# Altium PCB JD1622(V4).PcbDoc
Units mm, origin at the board's own origin, x right, y up, seen from the top; angles counter-clockwise.
Board outline 230.25 x 115.65 mm, 2 copper layers (Top Layer, Bottom Layer); 113 components, 117 nets, 494 pads, 248 vias.
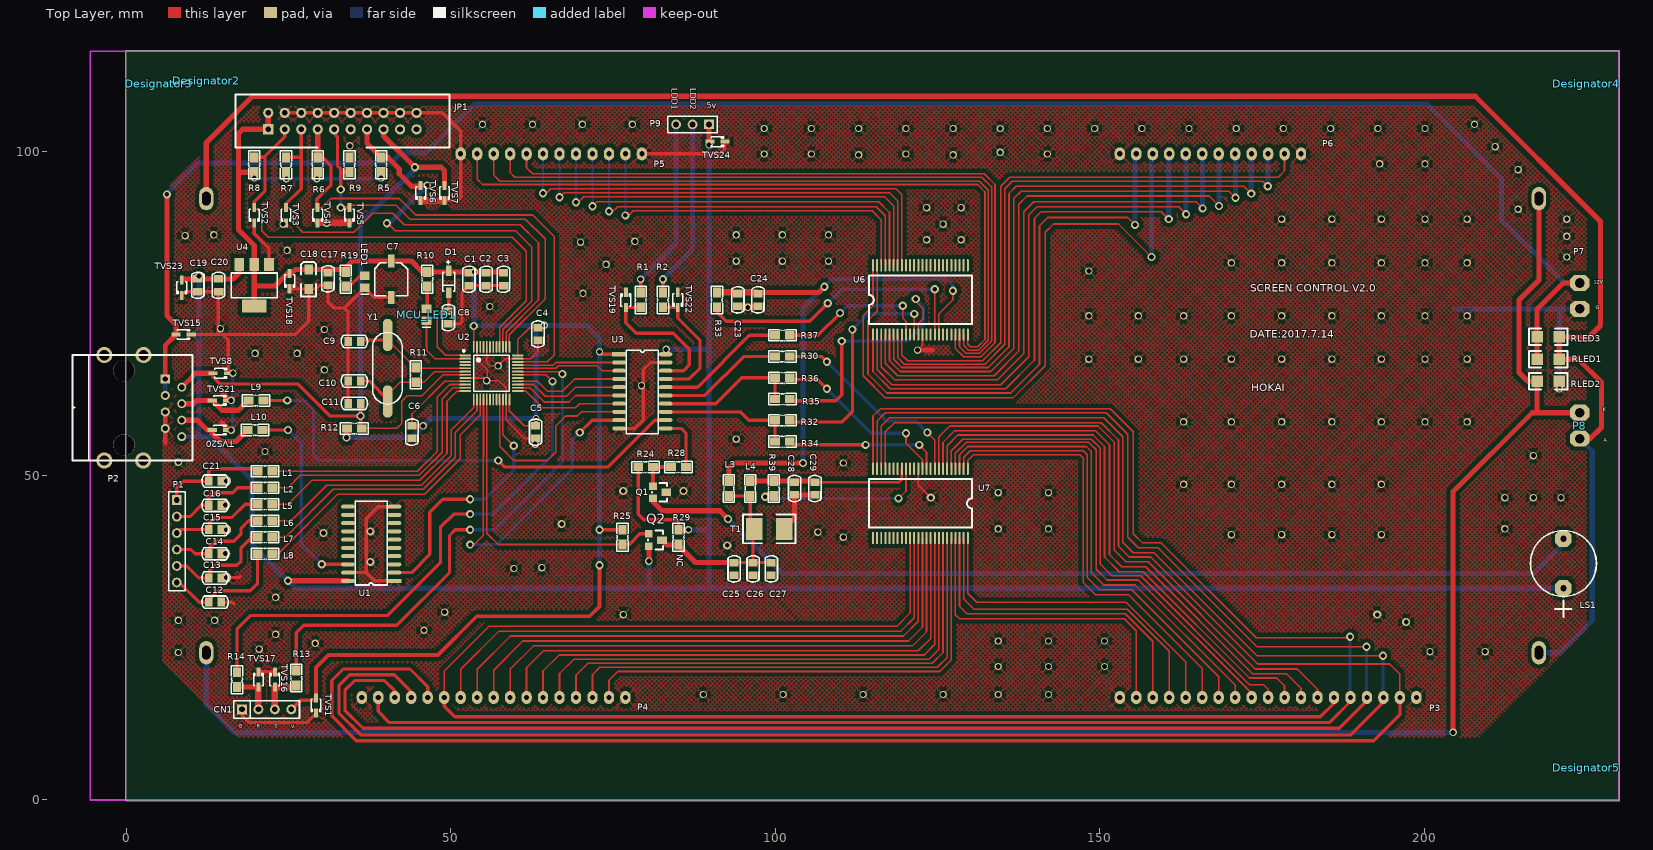
[diagram p0: Top Layer view]
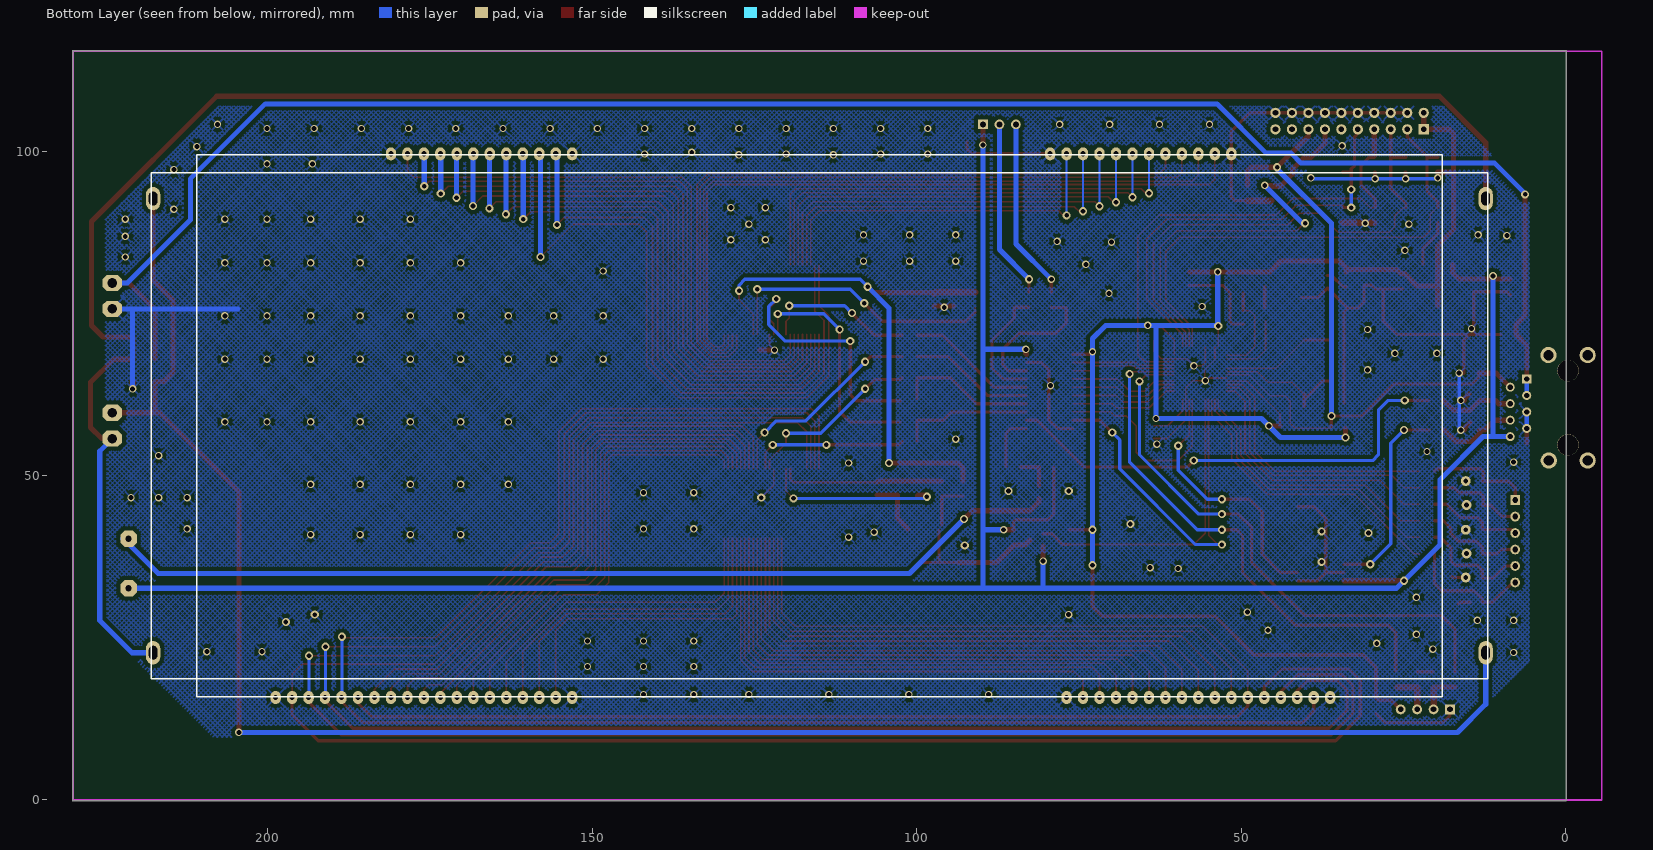
[diagram p1: Bottom Layer view, seen from below]

## Layer stack, top to bottom
Top Layer: signal copper 0.0356
Dielectric: dielectric 0.32, FR-4, Dk 4.8
Bottom Layer: signal copper 0.0356

## Board outline
-0.127,0 -0.127,115.4 cw(c0,115.4) 0,115.527 230,115.527 cw(c230,115.4) 230.127,115.4 230.127,0 cw(c230,0) 230,-0.127 0,-0.127 cw(c0,0)

## Design rules (kind name [scope] priority, off if disabled: settings)
Clearance Clearance_2 [All vs InPolygon] p1: gap=0.6
Clearance Clearance_1 [InNamedPolygon('PET')] p2: gap=3
Clearance [All] p3: gap=0.127
FabricationTestpoint [(IsPad And (OnTopLayer Or OnBottomLayer))] p1: side=3 testpointundercomponent=TRUE minsize=1.016 maxsize=2.54 preferedsize=1.524 minholesize=0 maxholesize=1.016 preferedholesize=0.813 testpointgrid=0.025 allowsidetop=TRUE allowsidebottom=TRUE usegrid=TRUE gridtolerance=0
PolygonConnect [All] p1: connectstyle=Relief reliefconductorwidth=0.3 reliefentries=4 polygonreliefangle="45 Angle"
RoutingVias [All] p1: holewidth=0.711 width=1.27 viastyle="Through Hole" minholewidth=0.711 minwidth=1.27 maxholewidth=0.711 maxwidth=1.27
SilkscreenOverComponentPads [All] p1: minsilkscreentomaskgap=0.254
SolderMaskExpansion [All] p1: expansion=0.102
Width [All] p1: maxlimit=1 minlimit=0.254 preferedwidth=0.5 minimp=50.000000 maximp=50.000000 favimp=50.000000
26 further rules are at their usual default settings.

## Classes and differential pairs
component class M1: C1 C2 C3 C4 C5 C6 C7 C8 C9 C10 C11 C12 C13 C14 C15 C16 C17 C18 C19 C20 C21 CN1 D1 JP1 L1 L2 L5 L6 L7 L8 L9 L10 LED1 LS1 MCU_LED1 P1 P2 P9 Q1 Q2 R1 R2 R5 R6 R7 R8 R9 R10 R11 R12 R13 R14 R19 R24 R25 R28 R29 TVS1 TVS2 TVS3 TVS4 TVS5 TVS6 TVS7 TVS8 TVS15 TVS16 TVS17 TVS18 TVS19 TVS20 TVS21 TVS22 TVS23 TVS24 U1 U2 U3 U4 Y1
component class M2: C23 C24 C25 C26 C27 C28 C29 L3 L4 P3 P4 P5 P6 P7 P8 R30 R32 R33 R34 R35 R36 R37 R39 RLED1 RLED2 RLED3 T1 U6 U7

## Components (designator, comment, footprint, x,y, rotation, side; value= is the part's Value field where it differs from the comment)
C1 "104/0805" C0805 52.705,81.216 r270 top
C2 "104/0805" C0805 55.372,81.216 r270 top
C3 "104/0805" C0805 58.039,81.216 r270 top
C4 "104/0805" C0805 63.373,72.771 r270 top
C5 "104/0805" C0805 62.992,57.658 r270 top
C6 "104/0805" C0805 43.942,57.658 r270 top
C7 "4.7uF/16V" CAP5X5 40.767,80.264 r270 top
C8 "104/0805" C0805 49.53,75.311 r270 top
C9 "22p/0805" C0805 36.068,70.739 r180 top
C10 "22p/0805" C0805 36.068,64.643 r180 top
C11 "105/0805" C0805 34.163,61.087 r0 top
C12 "104/0805" C0805 14.605,30.544 r180 top
C13 "104/0805" C0805 14.605,34.277 r180 top
C14 "104/0805" C0805 14.605,38.011 r180 top
C15 "104/0805" C0805 14.605,41.745 r180 top
C16 "104/0805" C0805 14.605,45.479 r180 top
C17 "104/0805" C0805 30.988,81.28 r270 top
C18 "10UF/16V" C3216 28.067,80.264 r270 top
C19 "104/0805" C0805 10.922,80.282 r270 top
C20 "104/0805" C0805 14.097,80.282 r270 top
C21 "104/0805" C0805 14.605,49.213 r180 top
C23 "104/0805" C0805 94.165,78.042 r270 top
C24 "102/0805" C0805 97.282,78.042 r270 top
C25 "103/0805" C0805 93.599,36.576 r270 top
C26 "105/0805" C0805 96.52,36.576 r270 top
C27 "106/0805" C0805 99.314,36.576 r270 top
C28 "104/0805" C0805 102.928,48.958 r270 top
C29 "102/0805" C0805 106.045,48.958 r270 top
CN1 "SCREEN2" 4Pin-2.54 21.59,13.97 r180 top
D1 "DIODE" SOD123 49.657,81.564 r90 top
Designator2 "Comment" 4.1mm 12.319,110.871 r0 top locked
Designator3 "Comment" 4.1mm 5,110.4 r0 top locked
Designator4 "Comment" 4.1mm 225,110.4 r0 top locked
Designator5 "Comment" 4.1mm 225,5 r0 top locked
JP1 "JTAG" IDC20_A 21.844,103.378 r0 top
L1 "FBMA-11-160808-601T" R0805 20.193,50.673 r0 top
L2 "FBMA-11-160808-601T" R0805 20.193,48.133 r0 top
L3 "10uH/0805" L0805 92.837,46.863 r90 top
L4 "10uH/0805" L0805 96.139,46.863 r90 top
L5 "FBMA-11-160808-601T" R0805 20.193,45.593 r0 top
L6 "FBMA-11-160808-601T" R0805 20.193,43.053 r0 top
L7 "FBMA-11-160808-601T" R0805 20.193,40.513 r0 top
L8 "FBMA-11-160808-601T" R0805 20.193,37.973 r0 top
L9 "FBMA-11-160808-601T" R0805 18.796,61.595 r0 top
L10 "FBMA-11-160808-601T" R0805 18.669,57.023 r0 top
LED1 "LED0805" LED_0805 36.703,79.883 r270 top
LS1 "Speaker" SPK 221.488,32.639 r90 top
MCU_LED1 "LED0805" LED_0805 46.228,74.803 r270 top
P1 "Header 6" HDR1X6 7.747,46.228 r270 top
P2 "Header 4X2" RJ45 5.969,64.897 r90 top locked
P3 "Header 19" H1*19 153.1,15.8 r0 top locked
P4 "Header 17" H1*17 36.26,15.8 r0 top locked
P5 "Header 12" H1*12 51.5,99.6 r0 top
P6 "Header 12" H1*12 153.1,99.6 r0 top
P7 "Header 2" CN2 224,75.7 r0 top locked
P8 "Header 2" CN2 224,55.7 r0 top locked
P9 "Header 3" HDR1X3 89.789,104.14 r180 top
Q1 "C9015/TO-92" SOT-23 81.153,48.387 r270 top
Q2 "C9015/TO-92" "SOT-23 - 9015" 80.518,41.021 r270 top
R1 "1KΩ/0.25W" R0805 79.248,75.946 r90 top
R2 "1KΩ/0.25W" R0805 82.677,75.946 r90 top
R5 "10kΩ/0.25W" R0805 39.243,99.06 r270 top
R6 "10kΩ/0.25W" R0805 29.456,99.06 r270 top
R7 "10kΩ/0.25W" R0805 24.575,99.06 r270 top
R8 "10kΩ/0.25W" R0805 19.685,99.06 r270 top
R9 "10kΩ/0.25W" R0805 34.352,96.775 r90 top
R10 "10kΩ/0.25W" R0805 46.355,81.407 r270 top
R11 "1MΩ/0.25W" R0805 44.577,66.675 r270 top
R12 "10kΩ/0.25W" R0805 36.258,57.277 r180 top
R13 "100Ω/0.25W" R0805 26.162,19.939 r270 top
R14 "100Ω/0.25W" R0805 17.018,19.685 r270 top
R19 "1kΩ/0.25W" R0805 33.782,81.407 r270 top
R24 "10kΩ/0.25W" R0805 81.153,51.308 r180 top
R25 "1kΩ/0.25W" R0805 76.454,39.37 r90 top
R28 "3kΩ/0.25W" R0805 86.233,51.308 r180 top
R29 "NC" R0805 85.09,39.37 r90 top
R30 "1MΩ/0.25W" R0805 99.949,68.351 r0 top
R32 "1MΩ/0.25W" R0805 99.949,58.522 r0 top
R33 "3KΩ/0.25W" R0805 91.001,78.231 r270 top
R34 "1MΩ/0.25W" R0805 99.949,55.245 r0 top
R35 "1MΩ/0.25W" R0805 99.949,61.798 r0 top
R36 "1MΩ/0.25W" R0805 99.949,65.075 r0 top
R37 "1MΩ/0.25W" R0805 99.949,71.628 r0 top
R39 "3KΩ/0.25W" R0805 99.764,49.148 r270 top
RLED1 "100Ω/0.25W" 1206 217.424,67.945 r0 top locked
RLED2 "100Ω/0.25W" 1206 220.853,64.516 r180 top locked
RLED3 "100Ω/0.25W" 1206 217.424,71.374 r0 top locked
T1 "6.0CA" TVS 101.346,41.783 r180 top
TVS1 "ESD05V32D-LC" SOD323 29.21,15.748 r270 top
TVS2 "ESD05V32D-LC" SOD323 19.684,91.313 r270 top
TVS3 "ESD05V32D-LC" SOD323 24.574,91.313 r270 top
TVS4 "ESD05V32D-LC" SOD323 29.456,91.313 r270 top
TVS5 "ESD05V32D-LC" SOD323 34.353,91.313 r270 top
TVS6 "ESD05V32D-LC" SOD323 45.339,94.742 r270 top
TVS7 "ESD05V32D-LC" SOD323 49.022,94.742 r270 top
TVS8 "ESD05V32D-LC" SOD323 13.335,65.786 r0 top
TVS15 "ESD15V32D-LC" SOD323 7.62,71.755 r0 top
TVS16 "ESD05V32D-LC" SOD323 22.86,17.399 r90 top
TVS17 "ESD05V32D-LC" SOD323 20.32,17.399 r90 top
TVS18 "ESD05V32D-LC" SOD323 25.146,81.153 r270 top
TVS19 "ESD08V32D-LC" SOD323 76.962,75.913 r90 top
TVS20 "ESD08V32D-LC" SOD323 13.208,57.023 r0 top
TVS21 "ESD08V32D-LC" SOD323 13.208,61.595 r0 top
TVS22 "ESD15V32D-LC" SOD323 84.963,78.263 r270 top
TVS23 "ESD08V32D-LC" SOD323 8.509,80.137 r270 top
TVS24 "ESD08V32D-LC" SOD323 89.916,101.473 r0 top
U1 "74HC245" SOP-20 41.275,33.782 r180 top
U2 "STM32F103C" LC-LQFP-48_7x7x05P 56.261,65.786 r270 top
U3 "74HC245" SOP-20 75.946,68.707 r0 top
U4 "AS1117M3-33/SOT-223" SOT-223-3L(M3) 21.971,82.55 r180 top
U6 "HT1621" HT1621B(SSOP) 115.062,71.755 r90 top
U7 "HT1621" HT1621B(SSOP) 129.667,51.054 r270 top
Y1 "XTAL" XTAL2 40.259,66.548 r90 top

## Footprints (in the part's own frame and the unit in brackets; to place one, negate y for a bottom-side part, rotate by r counter-clockwise, add the part's x,y. Pads: shape width x height; smd on the part's side, far side on the other; paste and mask are expansions set on the pad)
4.1mm [mm]
4Pin-2.54 [mil]
  rect 60x60 hole 35: 1(150,0)
  round 60 hole 35: 2(50,0) 3(-50,0) 4(-150,0)
  silkscreen extent -200,-52 200,53, body extent -200,-50 200,50, height 336
1206 [mil]
  rect 70x70 smd: 1(0,0) 2(135,0)
  silkscreen extent -50,-50 185,50
C0805 [mil]
  rect 45.37x55.12 smd: 1(-1,2) 2(76,2)
  silkscreen extent -42,-35 117,40
C3216 [mil] "A型/1206"
  rect 60x51.18 smd: 1(-59,0) 2(59,0)
  silkscreen extent -105,-45 105,45, body extent -63,-31 63,32, height 63
CAP5X5 [mm]
  rect 2x1 smd: 1(-2.794,0) 2(2.794,0)
  silkscreen extent -2.54,-2.54 2.54,2.54, body extent -2.27,-2.15 2.33,2.15, height 5.2
CN2 [mm]
  oct 3x2.5 hole 1.5: 1(0,0) 2(0,4)
H1*12 [mm]
  oval 1.6x2 hole 0.8: 1(0,0) 2(2.54,0) 3(5.08,0) 4(7.62,0) 5(10.16,0) 6(12.7,0) 7(15.24,0) 8(17.78,0) 9(20.32,0) 10(22.86,0) 11(25.4,0) 12(27.94,0)
H1*17 [mm]
  oval 1.6x2 hole 0.8: 1(0,0) 2(2.54,0) 3(5.08,0) 4(7.62,0) 5(10.16,0) 6(12.7,0) 7(15.24,0) 8(17.78,0) 9(20.32,0) 10(22.86,0) 11(25.4,0) 12(27.94,0) 13(30.48,0) 14(33.02,0) 15(35.56,0) 16(38.1,0) 17(40.64,0)
H1*19 [mm]
  oval 1.6x2 hole 0.8: 1(0,0) 2(2.54,0) 3(5.08,0) 4(7.62,0) 5(10.16,0) 6(12.7,0) 7(15.24,0) 8(17.78,0) 9(20.32,0) 10(22.86,0) 11(25.4,0) 12(27.94,0) 13(30.48,0) 14(33.02,0) 15(35.56,0) 16(38.1,0) 17(40.64,0) 18(43.18,0) 19(45.72,0)
HDR1X3 [mm] "Connector; Header; 3 Position"
  rect 1.5x1.5 hole 0.9: 1(0,0)
  round 1.5 hole 0.9: 2(2.54,0) 3(5.08,0)
  silkscreen extent -1.27,-1.27 6.35,1.27
HDR1X6 [mm] "Connector; Header; 6 Position"
  rect 1.5x1.5 hole 0.9: 1(0,0)
  round 1.5 hole 0.9: 2(2.54,0) 3(5.08,0) 4(7.62,0) 5(10.16,0) 6(12.7,0)
  silkscreen extent -1.27,-1.27 13.97,1.27
HT1621B(SSOP) [mil]
  oval 75x12 smd: 1(0,0) 2(0,-25) 3(0,-50) 4(0,-75) 5(0,-100) 6(0,-125) 7(0,-150) 8(0,-175) 9(0,-200) 10(0,-225) 11(0,-250) 12(0,-275) 13(0,-300) 14(0,-325) 15(0,-350) 16(0,-375) 17(0,-400) 18(0,-425) 19(0,-450) 20(0,-475) 21(0,-500) 22(0,-525) 23(0,-550) 24(0,-575) 25(420,-575) 26(420,-550) 27(420,-525) 28(420,-500) 29(420,-475) 30(420,-450) 31(420,-425) 32(420,-400) 33(420,-375) 34(420,-350) 35(420,-325) 36(420,-300) 37(420,-275) 38(420,-250) 39(420,-225) 40(420,-200) 41(420,-175) 42(420,-150) 43(420,-125) 44(420,-100) 45(420,-75) 46(420,-50) 47(420,-25) 48(420,0)
  silkscreen extent 63,-600 358,25
IDC20_A [mil]
  rect 62x62 hole 35: 1(0,0)
  round 62 hole 35: 2(0,100) 3(100,0) 4(100,100) 5(200,0) 6(200,100) 7(300,0) 8(300,100) 9(400,0) 10(400,100) 11(500,0) 12(500,100) 13(600,0) 14(600,100) 15(700,0) 16(700,100) 17(800,0) 18(800,100) 19(900,0) 20(900,100)
  silkscreen extent -200,-110 1100,210
L0805 [mil]
  rect 60x50 smd: 1(0,0) 2(90,0)
  silkscreen extent -39,-34 129,34
LC-LQFP-48_7x7x05P [mm]
  oval 0.28x1.8 smd mask+0.051: 1(-2.75,-4.05) 2(-2.25,-4.05) 3(-1.75,-4.05) 4(-1.25,-4.05) 5(-0.75,-4.05) 6(-0.25,-4.05) 7(0.25,-4.05) 8(0.75,-4.05) 9(1.25,-4.05) 10(1.75,-4.05) 11(2.25,-4.05) 12(2.75,-4.05) 25(2.75,4.05) 26(2.25,4.05) 27(1.75,4.05) 28(1.25,4.05) 29(0.75,4.05) 30(0.25,4.05) 31(-0.25,4.05) 32(-0.75,4.05) 33(-1.25,4.05) 34(-1.75,4.05) 35(-2.25,4.05) 36(-2.75,4.05)
  oval 1.8x0.28 smd mask+0.051: 13(4.05,-2.75) 14(4.05,-2.25) 15(4.05,-1.75) 16(4.05,-1.25) 17(4.05,-0.75) 18(4.05,-0.25) 19(4.05,0.25) 20(4.05,0.75) 21(4.05,1.25) 22(4.05,1.75) 23(4.05,2.25) 24(4.05,2.75) 37(-4.05,2.75) 38(-4.05,2.25) 39(-4.05,1.75) 40(-4.05,1.25) 41(-4.05,0.75) 42(-4.05,0.25) 43(-4.05,-0.25) 44(-4.05,-0.75) 45(-4.05,-1.25) 46(-4.05,-1.75) 47(-4.05,-2.25) 48(-4.05,-2.75)
  silkscreen extent -3.6,-4.42 2.75,2.75
LED_0805 [mm]
  rect 1.3x1.5 smd: 1(-0.95,0) 2(0.95,0)
  silkscreen extent 1.91,-0.63 1.91,0.64
R0805 [mil]
  rect 60x50 smd: 1(0,0) 2(90,0)
  silkscreen extent -39,-35 129,35
RJ45 [mil]
  rect 55x55 hole 31.5: 1(0,0)
  round 55 hole 31.5: 2(-50,-100) 3(-100,0) 4(-150,-100) 5(-200,0) 6(-250,-100) 7(-300,0) 8(-350,-100)
  round 130 hole 127.95 unplated: 9(50,250) 10(-400,250)
  round 98.42 hole 62.99: 11(145,370) 12(-495,370) ""(-495,133.78) ""(145,131.89)
  silkscreen extent -495,-165 145,563, body extent -490,-172 140,556, height 128
SOD123 [mm] "1206"
  rect 1.6x0.85 smd: A(0,0) K(-3.4,0)
  silkscreen extent -3.15,-0.9 1.6,0.9, body extent -3.6,-0.85 0.25,0.85, height 1.42
SOD323 [mm] "0805"
  rect 1.4x0.6 smd: 1(0,0) 2(2.35,0)
  silkscreen extent 0.22,-0.75 2.12,0.75, body extent -0.17,-0.67 2.43,0.63, height 1
SOP-20 [mm]
  rect 2.2x0.62 smd: 1(-0.025,0)
  oval 2.1x0.62 smd: 2(-0.025,-1.27) 3(-0.025,-2.54) 4(-0.025,-3.81) 5(-0.025,-5.08) 6(-0.025,-6.35) 7(-0.025,-7.62) 8(-0.025,-8.89) 9(-0.025,-10.16) 10(-0.025,-11.43) 11(7.143,-11.43) 12(7.143,-10.16) 13(7.143,-8.89) 14(7.143,-7.62) 15(7.143,-6.35) 16(7.143,-5.08) 17(7.143,-3.81) 18(7.143,-2.54) 19(7.143,-1.27) 20(7.143,0)
  silkscreen extent 1.07,-12.24 6.02,0.64
SOT-23 [mil]
  rect 46x46 smd: 1(0,0) 2(75,0)
  rect 46x60 smd: 3(38,80)
  silkscreen extent -20,-5 95,85
"SOT-23 - 9015" [mil]
  rect 46x46 smd: 1(0,0) 2(75,0)
  rect 46x60 smd: 3(38,80)
  silkscreen extent -20,-5 95,85
SOT-223-3L(M3) [mil]
  rect 59x79 smd: 1(0,0) 2(90.55,0) 3(181.1,0)
  rect 150x79 smd: 4(89.88,253.54)
  silkscreen extent -49,52 231,202
SPK [mil]
  oct 100x100 hole 39: 1(0,-0.13) 2(300,-0.13)
  silkscreen extent -175,-200 350,200
TVS [mil]
  rect 100x135 smd: 1(0,0) 2(180,0)
  silkscreen extent -70,-87 250,87
XTAL2 [mm]
  oval 5x1.5 smd: 1(-5.12,0) 2(5.13,0)
  silkscreen extent -5.54,-2.24 5.52,2.34

## Part data
C1 C2 C3 C4 C5 C6 C8 C11 C12 C13 C14 C15 C16 C17 C19 C20 C21 C23 C24 C25 C26 C27 C28 C29: library part CAP, "Capacitor"
C7 C18: library part ELECTRO1, "Electrolytic Capacitor"
C9 C10: library part CAP
CN1: library part CON4, "Connector"
JP1: library part JTAG20
L1 L2 L5 L6 L7 L8 L9 L10 R1 R2 R5 R6 R7 R8 R9 R10 R11 R12 R13 R14 R19 R24 R25 R28 R29 R30 R32 R33 R34 R35 R36 R37 R39 RLED1 RLED2 RLED3: library part RES2
L3 L4: library part INDUCTOR1
LS1: "Loudspeaker"
P1: "Header, 6-Pin"
P2: "Header, 4-Pin, Dual row"
P3: "Header, 19-Pin"
P4: "Header, 17-Pin"
P5 P6: "Header, 12-Pin"
P7 P8: "Header, 2-Pin"
P9: "Header, 3-Pin"
Q1 Q2: library part PNP
T1: library part "Diode 11DQ03", "Schottky Rectifier"
TVS1 TVS2 TVS3 TVS4 TVS5 TVS6 TVS7 TVS8 TVS15 TVS16 TVS17 TVS18 TVS19 TVS20 TVS21 TVS22 TVS23 TVS24: library part TVS
U2: "STM32单片机"
U4: library part AS1117M3-33
Y1: "Crystal Oscill"

## Free pads (board coordinates)
  round 1.524 hole 0.762: 0(15.367,49.149) 1(15.24,45.466) 2(15.367,41.656) 3(15.24,37.973) 4(15.367,34.29)
  oval 2.2x3.6 hole 1.3 slot 2.1 at 90 deg: A(12.3,92.7) A(217.7,22.7) K(12.3,22.7) K(217.7,92.7)

## Via types
v1: diameter 1.143, hole 0.762, Top Layer to Bottom Layer, 175 vias
v2: diameter 1.27, hole 0.711, Top Layer to Bottom Layer, 73 vias

## Nets (pads, with @x,y where several pads share a name; then routed paths per layer and width w, separated by ;. In a path a pad name is that pad's centre, name@x,y a point inside that pad or via, vN(x,y) a via of type N, cw(c..) or ccw(c..) an arc to the next point about the centre after c; other vN are vias at no path point)
1C0: P5.5 U6.21 | length 109.5
  Top Layer w0.254: P5.5 61.66,97.471 62.611,96.52 132.207,96.52 133.858,94.869 133.858,70.485 131.699,68.326 129.032,68.326 127.762,69.596 U6.21
1C1: P5.4 U6.22 | length 109.9
  Top Layer w0.254: P5.4 59.12,96.709 59.817,96.012 131.826,96.012 133.35,94.488 133.35,70.739 131.445,68.834 129.413,68.834 128.397,69.85 U6.22
1C2: P5.3 U6.23 | length 110
  Top Layer w0.254: P5.3 56.58,96.328 57.531,95.377 131.445,95.377 132.842,93.98 132.842,70.866 131.318,69.342 129.794,69.342 129.032,70.104 U6.23
1C3: P5.2 U6.24 | length 110.6
  Top Layer w0.254: P5.2 54.04,95.693 54.864,94.869 131.191,94.869 132.334,93.726 132.334,70.993 131.191,69.85 130.048,69.85 129.667,70.231 U6.24
1S0: P6.11 U6.8 | length 91.4
  Top Layer w0.254: U6.8 119.507,68.58 120.396,67.691 131.953,67.691 134.747,70.485 134.747,94.615 136.144,96.012 177.546,96.012 178.5,96.966 P6.11
1S1: P6.10 U6.7 | length 92.1
  Top Layer w0.254: U6.7 118.872,68.199 119.888,67.183 132.334,67.183 135.382,70.231 135.382,94.234 136.525,95.377 175.133,95.377 v2(175.895,94.615)
  Bottom Layer w0.8: v2(175.895,94.615) 175.895,99.535 P6.10
1S2: P6.9 U6.6 | length 91.5
  Top Layer w0.254: U6.6 118.237,67.945 119.507,66.675 132.842,66.675 136.017,69.85 136.017,93.472 137.16,94.615 172.212,94.615 v2(173.355,93.472)
  Bottom Layer w0.8: v2(173.355,93.472) 173.355,99.535 P6.9
1S3: P6.8 U6.5 | length 90.4
  Top Layer w0.254: U6.5 117.602,67.691 119.253,66.04 133.223,66.04 136.779,69.596 136.779,92.71 137.922,93.853 169.926,93.853 v2(170.942,92.837)
  Bottom Layer w0.8: P6.8 170.942,99.538 v2(170.942,92.837)
1S4: P6.7 U6.4 | length 90
  Top Layer w0.254: U6.4 116.967,67.31 118.872,65.405 133.731,65.405 137.541,69.215 137.541,91.821 138.811,93.091 166.878,93.091 v2(168.402,91.567)
  Bottom Layer w0.8: v2(168.402,91.567) P6.7@168.402,99.538
1S5: P6.6 U6.3 | length 88.3
  Top Layer w0.254: U6.3 116.332,66.802 118.364,64.77 134.239,64.77 138.303,68.834 138.303,90.678 139.827,92.202 164.846,92.202 v2(165.862,91.186)
  Bottom Layer w0.8: v2(165.862,91.186) P6.6@165.862,99.538
1S6: P6.5 U6.2 | length 88
  Top Layer w0.254: U6.2 115.697,66.294 117.983,64.008 134.747,64.008 139.065,68.326 139.065,90.17 140.335,91.44 162.179,91.44 v2(163.322,90.297)
  Bottom Layer w0.8: P6.5 163.322,99.538 v2(163.322,90.297)
1S7: P6.4 U6.1 | length 87.1
  Top Layer w0.254: U6.1 115.062,66.04 117.729,63.373 135.509,63.373 139.954,67.818 139.954,89.662 140.97,90.678 159.512,90.678 v2(160.655,89.535)
  Bottom Layer w0.8: v2(160.655,89.535) 160.655,99.535 P6.4
1S8: P6.3 U6.48 | length 104.8
  Top Layer w0.254: U6.48 115.062,76.2 113.538,74.676 113.538,65.405 116.967,61.976 136.652,61.976 141.605,66.929 141.605,87.503 142.875,88.773 152.908,88.773 v2(157.988,83.693)
  Bottom Layer w0.8: v2(157.988,83.693) 157.988,99.408 P6.3
1S9: P6.2 U6.47 | length 94.6
  Top Layer w0.254: U6.47 115.697,75.311 114.3,73.914 114.3,65.659 117.221,62.738 136.271,62.738 140.716,67.183 140.716,88.519 141.986,89.789 154.305,89.789 v2(155.448,88.646)
  Bottom Layer w0.8: v2(155.448,88.646) P6.2@155.448,99.408
1S10: P5.11 U6.46 | length 56.8
  Top Layer w0.254: v2(76.9,90.105) 77.405,90.105 78.105,90.805 114.935,90.805 116.332,89.408 U6.46
  Bottom Layer w0.254: v2(76.9,90.105) P5.11
1S11: P5.10 U6.45 | length 60
  Top Layer w0.254: v2(74.36,90.743) 74.995,90.743 75.692,91.44 115.57,91.44 116.967,90.043 U6.45
  Bottom Layer w0.254: v2(74.36,90.743) P5.10
1S12: P5.9 U6.44 | length 63
  Top Layer w0.254: v2(71.82,91.502) 72.52,92.202 115.951,92.202 117.602,90.551 U6.44
  Bottom Layer w0.254: v2(71.82,91.502) P5.9
1S13: P5.8 U6.43 | length 66.5
  Top Layer w0.254: v2(69.28,92.137) 69.658,92.137 70.485,92.964 116.84,92.964 118.237,91.567 U6.43
  Bottom Layer w0.254: v2(69.28,92.137) P5.8
1S14: P5.7 U6.42 | length 69.6
  Top Layer w0.254: v2(66.74,92.899) 67.44,93.599 117.602,93.599 118.872,92.329 U6.42
  Bottom Layer w0.254: v2(66.74,92.899) P5.7
1S15: P5.6 U6.41 | length 73
  Top Layer w0.254: v2(64.2,93.534) 64.705,93.534 65.405,94.234 118.618,94.234 119.507,93.345 U6.41
  Bottom Layer w0.254: v2(64.2,93.534) P5.6
2C0: P3.18 P4.5 U7.21 | length 309.2
  Top Layer w0.254: U7.21 116.967,56.769 118.364,58.166 150.241,58.166 152.908,55.499 152.908,39.116 154.559,37.465 157.861,37.465 174.371,20.955 194.691,20.955 196.28,19.366 P3.18
  Top Layer w0.5: P4.5 46.42,17.461 43.688,20.193 33.401,20.193 31.623,18.415 31.623,12.954 35.433,9.144 192.278,9.144 196.28,13.146 P3.18
2C1: P3.17 P4.4 U7.22 | length 298.8
  Top Layer w0.254: U7.22 116.332,57.658 117.602,58.928 150.622,58.928 153.543,56.007 153.543,39.751 155.194,38.1 158.369,38.1 174.244,22.225 v2(193.675,22.225)
  Top Layer w0.5: P4.4 43.88,16.699 41.275,19.304 34.417,19.304 32.766,17.653 32.766,13.335 36.068,10.033 188.722,10.033 193.74,15.051 P3.17
  Bottom Layer w0.508: P3.17@193.675,15.865 v2(193.675,22.225)
2C2: P3.16 P4.3 U7.23 | length 289.4
  Top Layer w0.254: U7.23 115.697,58.42 116.967,59.69 151.003,59.69 154.305,56.388 154.305,40.513 155.956,38.862 159.004,38.862 174.244,23.622 v2(191.135,23.622)
  Top Layer w0.5: P4.3 41.34,16.826 39.751,18.415 35.179,18.415 33.655,16.891 33.655,13.841 36.447,11.049 186.944,11.049 191.2,15.305 P3.16
  Bottom Layer w0.508: v2(191.135,23.622) 191.135,15.865 P3.16
2C3: P3.15 P4.2 U7.24 | length 270.3
  Top Layer w0.254: U7.24 115.062,59.182 116.205,60.325 151.638,60.325 155.194,56.769 155.194,41.021 156.591,39.624 159.512,39.624 174.117,25.019 188.468,25.019 v2(188.595,25.146)
  Top Layer w0.5: P4.2 38.8,13.651 40.513,11.938 185.42,11.938 188.66,15.178 P3.15
  Bottom Layer w0.254: P3.15@188.468,15.992 188.595,15.865 P3.15
  Bottom Layer w0.508: P3.15@188.595,15.865 v2(188.595,25.146)
2S0: P3.13 U7.8 | length 91.8
  Top Layer w0.254: U7.8 125.222,56.007 126.873,57.658 149.733,57.658 152.273,55.118 152.273,38.481 154.051,36.703 157.48,36.703 173.99,20.193 180.467,20.193 183.58,17.08 P3.13
2S1: P3.12 U7.7 | length 87.7
  Top Layer w0.254: U7.7 125.857,55.118 127.635,56.896 149.352,56.896 151.511,54.737 151.511,37.846 153.416,35.941 157.099,35.941 173.609,19.431 178.816,19.431 181.04,17.207 P3.12
2S2: P3.11 U7.6 | length 84
  Top Layer w0.254: U7.6 126.492,54.61 128.143,56.261 148.971,56.261 150.749,54.483 150.749,37.465 153.035,35.179 156.718,35.179 173.101,18.796 177.292,18.796 178.5,17.588 P3.11
2S3: P3.10 U7.5 | length 80.2
  Top Layer w0.254: U7.5 127.127,53.848 128.905,55.626 148.717,55.626 150.114,54.229 150.114,36.322 151.892,34.544 156.337,34.544 173.101,17.78 175.26,17.78 175.96,17.08 P3.10 P3.10@176.022,15.862
2S4: P3.9 U7.4 | length 76.2
  Top Layer w0.254: U7.4 127.762,53.467 129.413,55.118 148.336,55.118 149.479,53.975 149.479,35.56 151.13,33.909 155.956,33.909 173.42,16.445 P3.9
2S5: P3.8 U7.3 | length 73.2
  Top Layer w0.254: U7.3 128.397,53.213 129.667,54.483 147.955,54.483 148.717,53.721 148.717,35.052 150.622,33.147 155.448,33.147 170.88,17.715 P3.8
2S6: P3.7 U7.2 | length 70.2
  Top Layer w0.254: U7.2 129.032,52.832 130.048,53.848 147.447,53.848 148.082,53.213 148.082,34.29 149.987,32.385 154.94,32.385 168.34,18.985 P3.7
2S7: P3.6 U7.1 | length 67.1
  Top Layer w0.254: U7.1 129.667,52.324 130.556,53.213 146.939,53.213 147.447,52.705 147.447,33.528 149.352,31.623 154.432,31.623 165.8,20.255 P3.6
2S8: P3.5 U7.48 | length 52
  Top Layer w0.254: U7.48 129.667,31.877 131.064,30.48 154.051,30.48 163.26,21.271 P3.5
2S9: P3.4 U7.47 | length 51.5
  Top Layer w0.254: U7.47 129.032,30.988 130.619,29.401 154.242,29.401 160.72,22.922 P3.4
2S10: P3.3 U7.46 | length 51.2
  Top Layer w0.254: U7.46 128.397,29.845 129.54,28.702 153.924,28.702 158.18,24.446 P3.3
2S11: P3.2 U7.45 | length 51
  Top Layer w0.254: U7.45 127.762,28.575 128.397,27.94 153.797,27.94 155.64,26.097 P3.2
2S12: P4.16 U7.44 | length 75.5
  Top Layer w0.254: P4.16 74.36,16.51 74.36,18.48 75.692,19.812 125.349,19.812 127.127,21.59 127.127,26.797 127.127,28.067 U7.44
2S13: P4.15 U7.43 | length 77.7
  Top Layer w0.254: P4.15 71.82,19.304 72.963,20.447 124.968,20.447 126.492,21.971 U7.43
2S14: P4.14 U7.42 | length 79.1
  Top Layer w0.254: P4.14 69.28,19.242 71.12,21.082 124.206,21.082 125.857,22.733 U7.42
2S15: P4.13 U7.41 | length 80.9
  Top Layer w0.254: P4.13 66.74,19.496 68.961,21.717 123.698,21.717 125.222,23.241 U7.41
2S16: P4.12 U7.40 | length 82.6
  Top Layer w0.254: P4.12 64.2,19.877 66.675,22.352 122.936,22.352 124.587,24.003 U7.40
2S17: P4.11 U7.39 | length 84.2
  Top Layer w0.254: P4.11 61.66,20.385 64.262,22.987 122.047,22.987 123.952,24.892 U7.39
2S18: P4.10 U7.38 | length 85.4
  Top Layer w0.254: P4.10 59.12,20.131 62.738,23.749 121.158,23.749 123.317,25.908 U7.38
2S19: P4.9 U7.37 | length 86.8
  Top Layer w0.254: P4.9 56.58,20.004 61.087,24.511 120.523,24.511 122.682,26.67 U7.37
2S20: P4.8 U7.36 | length 88.3
  Top Layer w0.254: P4.8@53.975,15.865 P4.8 54.04,20.131 59.182,25.273 119.761,25.273 122.047,27.559 U7.36
2S21: P4.7 U7.35 | length 89.8
  Top Layer w0.254: P4.7 51.5,20.131 57.404,26.035 119.38,26.035 121.412,28.067 U7.35
2S22: P3.14 P4.6 U7.34 | length 232.1
  Top Layer w0.254: P4.6 48.96,19.877 55.88,26.797 118.745,26.797 120.777,28.829 U7.34
  Top Layer w0.5: P4.6 48.96,14.478 50.611,12.827 184.023,12.827 186.12,14.924 P3.14
3.3V: C1.1 C2.1 C3.1 C4.1 C5.1 C6.1 C7.1 C17.1 C18.1 CN1.4 D1.A JP1.1 JP1.2 R5.2 R6.2 R7.2 R8.2 R10.1 R12.2 R19.1 R25.2 TVS1.1 TVS18.1 U2.9 U2.24 U2.36 U2.48 U3.1 U4.2 U4.4 | length 309.6
  Top Layer w0.254: C6.1 43.993,59.487 49.042,64.536 U2.9 ; U2.48 v2(53.511,73.069) ; U2.24 59.011,59.988 61.316,57.683 C5.1 C5.1@63.424,57.683 ; U2.36 60.311,70.979 62.128,72.796 C4.1
  Top Layer w0.6: v1(24.638,95.758) R7.2@24.638,96.71 ; CN1.4 26.797,15.367 28.829,15.367 TVS1.1 29.21,20.447 31.115,22.352 48.006,22.352 53.975,28.321 71.374,28.321 72.898,29.845 v2(72.898,36.195) ; v1(29.337,95.758) R6.2@29.337,96.71 ; v2(72.898,41.656) R25.2 ; v1(72.898,69.088) 73.279,68.707 U3.1
  Top Layer w0.8: U4.4@19.671,76.127 19.671,79.375 ; R8.2 17.272,96.774 ; JP1.2 JP1.1 17.907,103.378 17.272,102.743 17.272,96.774 ; R19.1@33.426,81.763 C18.1 26.01,81.763 25.4,81.153 TVS18.1 24.765,81.153 22.86,79.248 19.798,79.248 19.671,79.375 ; R19.1 33.782,82.042 34.798,83.058 C7.1 43.942,83.058 45.593,81.407 R10.1 52.756,81.407 v1(53.594,81.407) C3.1@57.925,81.407 ; v2(33.909,55.88) 33.909,57.214 R12.2 ; C6.1@44.018,57.658 v1(45.72,57.658) ; 17.272,96.774 17.272,87.884 19.671,85.485 U4.2 19.671,79.375
  Bottom Layer w0.6: v1@19.812,95.758 v1(24.638,95.758) v1(29.337,95.758) 39.116,95.758 v1(39.243,95.885) ; CN1.4@25.273,14.097 CN1.4
  Bottom Layer w0.8: v2(33.909,55.88) 43.942,55.88 v1(45.72,57.658) 46.863,58.801 v1(63.119,58.801) 63.119,73.152 ; v1(53.594,81.407) 53.594,73.152 63.119,73.152 ; v2(72.898,36.195) v2(72.898,41.656) v1(72.898,69.088) 72.898,71.12 70.866,73.152 v1(64.389,73.152) 63.119,73.152
  other v1: 19.685,95.885
+5V: C19.1 C20.1 LS1.1 P2.8 P9.1 Q2.2 R24.2 R29.2 TVS23.1 TVS24.1 U1.20 U3.20 U4.3 | length 378
  Top Layer w0.5: R24.2 78.867,44.069 79.756,43.18 84.709,43.18 85.09,42.799 R29.2
  Top Layer w0.762: TVS23.1@8.509,80.308 C19.1
  Top Layer w0.8: C19.1 C20.1 16.427,80.308 17.371,81.252 U4.3 ; v2(24.892,33.782) U1.20 ; v1(80.518,36.83) Q2.2 ; U3.20 83.185,68.803 v1(83.185,69.469) ; R29.2 86.487,41.656 v1@86.614,41.783 ; v1(89.789,100.965) P9.1
  Bottom Layer w0.8: P2.8 11.176,56.007 ; v2(11.176,80.772) 11.176,56.007 ; 80.518,32.893 v1(80.518,36.83) ; v1(83.185,69.469) 89.662,69.469 ; v1(86.614,41.656) 89.789,41.656 ; v1(89.789,100.965) 89.789,41.656 ; LS1.1 89.789,32.639 ; 11.176,56.007 12.7,56.007 19.304,49.403 19.304,39.37 v2(24.892,33.782) 26.035,32.639 89.789,32.639 ; 89.789,32.639 89.789,41.656
+12V: P2.1 P2.3 P7.2 RLED1.1 RLED3.1 TVS15.1 | length 287
  Top Layer w0.762: P2.1 5.969,70.104 TVS15.1 7.62,73.279 6.223,74.676 v2(6.223,93.345) ; RLED1.1 RLED3.1 217.424,75.692 221.432,79.7 P7.2
  Bottom Layer w0.762: P2.3 P2.1 ; v2(6.223,93.345) 6.223,93.472 10.922,98.171 40.767,98.171 42.291,99.695 46.101,99.695 53.721,107.315 200.406,107.315 211.963,95.758 211.963,89.408 221.671,79.7 P7.2
A: P8.1 pad.A RLED1.2 RLED3.2 | length 319.1
  Top Layer w0.8: pad.A@12.3,92.7 12.3,101.346 19.431,108.477 207.88,108.477 227.203,89.154 227.203,73.152 225.425,71.374 RLED3.2 RLED1.2 223.774,67.945 227.33,64.389 227.33,57.404 225.626,55.7 P8.1
  Bottom Layer w0.8: pad.A@217.7,22.7 220.947,22.7 225.933,27.686 225.933,53.767 P8.1
BAT: C8.1 D1.K U2.1 | length 14.5
  Top Layer w0.254: C8.1@49.657,75.413 48.616,75.413 47.879,74.676 47.879,69.85 49.193,68.536 U2.1
  Top Layer w0.5: C8.1@49.657,75.413 D1.K
BEEP: U2.16 U3.9 | length 57.1
  Top Layer w0.254: v2(52.959,39.37) 53.594,39.37 54.994,40.77 54.994,43.561 U2.16
  Top Layer w0.5: v2(69.85,56.642) 71.755,58.547 U3.9
  Bottom Layer w0.5: v2(52.959,39.37) 57.023,39.37 68.707,51.054 68.707,55.499 v2(69.85,56.642)
CS1: R37.2 U6.9 | length 23.9
  Top Layer w0.254: v2(119.634,76.2) 119.634,74.295 120.142,73.787 U6.9
  Top Layer w0.508: R37.2 106.553,71.628 v2(109.982,75.057)
  Bottom Layer w0.508: v2(109.982,75.057) 111.125,76.2 v2(119.634,76.2)
CS2: R30.2 U7.9 | length 32.1
  Top Layer w0.254: v2(123.444,56.642) 124.587,55.499 U7.9
  Top Layer w0.508: R30.2 107.163,68.351 v2(107.95,67.564)
  Bottom Layer w0.508: v2(107.95,67.564) 117.094,58.42 121.666,58.42 v2(123.444,56.642)
DATA1: R35.2 U6.12 | length 40.7
  Top Layer w0.254: v2(121.666,77.216) 121.666,76.835 122.809,75.692 122.809,74.168 122.047,73.406 U6.12
  Top Layer w0.508: R35.2@102.489,61.544 109.296,61.544 110.236,62.484 v2(110.236,70.739)
  Bottom Layer w0.508: v2(110.236,70.739) 120.269,70.739 122.809,73.279 122.809,76.073 v2(121.666,77.216)
DATA2: R36.2 U7.12 | length 28
  Top Layer w0.254: v2(120.142,56.515) 120.142,54.991 122.682,52.451 U7.12
  Top Layer w0.508: R36.2 102.489,64.821 106.502,64.821 v2(107.95,63.373)
  Bottom Layer w0.508: v2(107.95,63.373) 114.808,56.515 v2(120.142,56.515)
GND: C1.2 C2.2 C3.2 C4.2 C5.2 C6.2 C7.2 C8.2 C9.2 C10.2 C11.1 C12.1 C13.1 C14.1 C15.1 C16.1 C17.2 C18.2 C19.2 C20.2 C21.1 C23.2 C24.2 C25.2 C26.2 C27.2 C28.2 C29.2 CN1.1 JP1.4 JP1.6 JP1.8 JP1.10 JP1.12 JP1.14 JP1.16 JP1.18 JP1.20 LED1.2 P2.5 P2.7 P3.1 P3.19 P4.1 P4.17 P5.1 P5.12 P6.1 P6.12 P7.1 pad.0 pad.1 pad.2 pad.3 pad.4 Q1.3 R9.2 RLED2.1 T1.1 TVS1.2 TVS2.2 TVS3.2 TVS4.2 TVS5.2 TVS6.2 TVS7.2 TVS8.2 TVS15.2 TVS16.2 TVS17.2 TVS18.2 TVS19.2 TVS20.2 TVS21.2 TVS22.1 TVS23.2 TVS24.2 U1.1 U1.10 U1.19 U2.8 U2.23 U2.35 U2.44 U2.47 U3.10 U3.19 U4.1 U6.13 U7.13 | length 332.1
  Top Layer w0.254: U2.8 55.106,65.036 v1(55.499,64.643) v1@55.626,64.643 ; U2.47 54.011,67.909 55.626,66.294 v1@55.626,64.643 ; U2.44 55.511,67.425 56.007,66.929 v1(57.277,66.929) 58.384,68.036 U2.35 62.321,68.036 63.424,69.139 C4.2 ; C5.2@63.424,55.728 C5.2 61.366,55.728 58.511,58.583 U2.23 58.511,63.536 57.404,64.643 v1@55.626,64.643 ; v1(121.92,69.342) 122.682,70.104 U6.13 ; U7.13 122.047,48.514 v2(123.952,46.609)
  Top Layer w0.5: TVS23.2 9.074,78.352 C19.2 C20.2 14.148,71.806 ; TVS15.2 14.859,71.755 ; C12.1 16.243,30.493 16.51,30.226 ; pad.4 17.399,34.29 17.526,34.417 ; TVS8.2 15.685,70.929 14.859,71.755 ; CN1.1 17.78,13.081 18.923,11.938 27.75,11.938 TVS1.2 ; TVS2.2 19.684,87.25 21.971,84.963 U4.1 ; TVS17.2 TVS16.2 ; JP1.4 JP1.6 JP1.8 JP1.10 JP1.12 JP1.14 JP1.16 JP1.18 JP1.20 48.641,105.918 51.5,103.059 P5.1 51.5,92.902 50.99,92.392 TVS7.2 ; TVS18.2 25.184,78.765 C18.2 ; U1.19 36.957,35.052 ; C11.1 C10.2 C9.2 34.138,75.27 33.589,75.819 ; C7.2 38.1,77.47 36.703,78.867 LED1.2 33.589,75.819 ; U1.1 38.227,33.782 36.957,35.052 ; U1.10 38.735,45.212 36.957,43.434 36.957,35.052 ; C8.2 51.41,73.381 51.689,73.66 51.689,78.219 C1.2 C2.2 C3.2 ; U3.10 78.359,57.277 79.629,58.547 79.629,66.294 80.772,67.437 U3.19 ; v1@76.409,28.747 v1(76.581,28.575) ; P5.12 91.472,99.6 92.266,100.394 TVS24.2 ; 14.859,71.755 26.035,71.755 28.067,73.787 C18.2 ; C18.2 29.235,78.765 29.82,79.35 C17.2 31.039,76.784 32.004,75.819 33.589,75.819
  Top Layer w0.762: 5.969,54.991 P2.7 P2.5 ; 14.732,58.166 15.558,57.34 TVS20.2 ; 14.859,62.611 15.558,61.912 TVS21.2 ; C23.2 C24.2
  Top Layer w0.8: T1.1 102.979,43.416 C28.2 C29.2 ; v1(121.92,69.342) 124.206,69.342
  Top Layer w1: TVS4.2 TVS5.2 ; TVS6.2 TVS7.2 ; v1(220.853,63.373) RLED2.1
  Bottom Layer w0.5: v1(16.129,57.023) 16.383,57.277 v1(16.383,65.786)
  Bottom Layer w0.762: P2.7 P2.5 ; 204.605,75.7 220.726,75.7 ; v1(220.853,63.373) 220.853,75.573 220.726,75.7 ; P7.1 220.726,75.7
  other v1: 88.9,16.256 101.219,16.256 113.538,16.256 125.857,16.256 134.366,16.256 142.113,16.256 134.366,20.574 142.113,20.574 150.749,20.574 8.001,22.733 200.914,22.86 209.423,22.86 20.447,23.241 29.083,24.13 134.366,24.511 142.113,24.511 150.749,24.511 22.987,25.527 45.847,26.162 8.001,27.686 13.589,27.686 49.022,28.956 22.987,31.242 59.69,35.687 64.008,35.814 110.49,40.513 170.307,40.894 178.054,40.894 185.801,40.894 193.421,40.894 106.553,41.275 134.366,41.783 142.113,41.783 212.471,41.783 212.471,46.609 216.852,46.609 221.107,46.609 134.366,47.371 142.113,47.371 162.941,48.641 170.307,48.641 178.054,48.641 185.801,48.641 193.421,48.641 110.49,51.943 8.001,52.07 216.852,53.086 21.336,53.721 62.992,54.864 93.98,55.626 162.941,58.293 170.307,58.293 178.054,58.293 185.801,58.293 193.421,58.293 200.152,58.293 206.629,58.293 16.129,61.595 79.375,63.881 30.48,66.294 148.336,67.945 155.956,67.945 162.941,67.945 170.307,67.945 178.054,67.945 185.801,67.945 193.421,67.945 200.152,67.945 206.629,67.945 19.812,68.834 26.289,68.834 30.48,72.517 14.478,72.644 148.336,74.612 155.956,74.612 162.941,74.612 170.307,74.612 178.054,74.612 185.801,74.612 193.421,74.612 200.152,74.612 206.629,74.612 95.758,75.946 56.007,76.073 70.358,78.105 148.336,81.534 73.914,82.55 170.307,82.804 178.054,82.804 185.801,82.804 193.421,82.804 200.152,82.804 206.629,82.804 93.98,83.058 101.092,83.058 108.204,83.058 221.996,83.693 24.765,84.709 69.977,85.979 78.359,86.106 123.317,86.36 128.651,86.36 221.996,86.868 9.017,86.995 13.462,87.122 93.98,87.122 101.092,87.122 108.204,87.122 24.13,88.773 125.857,88.773 30.861,88.9 178.054,89.535 185.801,89.535 193.421,89.535 200.152,89.535 206.629,89.535 221.996,89.535 214.503,91.059 123.317,91.313 128.651,91.313 214.503,97.155 193.167,98.044 200.152,98.044 112.849,99.441 127.399,99.441 98.298,99.568 105.573,99.568 120.124,99.568 141.95,99.568 134.674,99.822 210.947,100.711 34.417,100.838 98.298,103.505 105.573,103.505 112.849,103.505 120.124,103.505 127.399,103.505 134.674,103.505 141.95,103.505 149.225,103.505 156.5,103.505 163.776,103.505 171.051,103.505 178.326,103.505 185.601,103.505 192.877,103.505 200.152,103.505 54.864,104.14 62.569,104.14 70.273,104.14 77.978,104.14 207.772,104.14
  other v2: 197.231,27.432 192.786,28.575 37.592,36.703 92.583,39.243 30.353,41.148 37.592,41.402 67.056,42.545 76.581,47.625 85.852,47.625
H1: C13.2 L7.1 P1.5 | length 17.7
  Top Layer w0.5: P1.5 9.271,36.068 11.125,34.214 12.827,34.214 12.827,35.433 13.589,36.195 17.018,36.195 17.653,36.83 17.653,38.862 19.304,40.513 L7.1
H2: C12.2 L8.1 P1.6 | length 19.8
  Top Layer w0.5: P1.6 8.128,33.528 11.176,30.48 12.827,30.48 12.827,30.988 14.097,32.258 19.05,32.258 20.193,33.401 L8.1
JTCK: JP1.9 R9.1 TVS5.1 U2.37 | length 66.7
  Top Layer w0.254: TVS5.1@34.163,91.694 41.529,91.694 43.688,89.535 61.468,89.535 64.516,86.487 64.516,77.216 59.011,71.711 U2.37
  Top Layer w0.5: JP1.9 32.004,102.743 32.512,102.235 32.512,97.79 33.02,97.282 33.02,97.028 ; v2(33.02,91.313) TVS5.1 ; v2(33.02,94.107) 33.02,97.028 ; R9.1 33.273,96.775 33.02,97.028
  Bottom Layer w0.5: v2(33.02,91.313) v2(33.02,94.107)
JTDI: JP1.5 R7.1 TVS3.1 U2.38 | length 78
  Top Layer w0.254: TVS3.1 25.019,91.313 26.289,90.043 26.289,88.392 27.178,87.503 35.052,87.503 37.973,90.424 41.021,90.424 42.799,88.646 60.706,88.646 63.5,85.852 63.5,77.089 58.511,72.1 U2.38
  Top Layer w0.5: TVS3.1 24.574,91.884 26.924,94.234 26.924,99.06 ; R7.1 26.924,99.06 ; JP1.5 26.924,99.06
JTDO: JP1.13 R5.1 TVS6.1 U2.39 | length 64.4
  Top Layer w0.254: v2(40.132,88.9) 40.259,88.9 41.402,87.757 59.944,87.757 62.484,85.217 62.484,76.962 58.011,72.489 U2.39
  Top Layer w0.8: JP1.13 37.084,101.219 R5.1 40.259,99.06 42.037,97.282 42.037,96.52 43.942,94.615 45.212,94.615 TVS6.1 v1(46.355,94.742)
  Bottom Layer w0.8: v2(40.132,88.9) 40.513,88.9 v1(46.355,94.742)
JTMS: JP1.7 R6.1 TVS4.1 U2.34 | length 77.9
  Top Layer w0.254: TVS4.1@29.337,91.313 TVS4.1 30.099,91.313 31.496,92.71 42.037,92.71 44.577,90.17 62.611,90.17 65.913,86.868 65.913,68.58 64.869,67.536 U2.34
  Top Layer w0.5: TVS4.1@29.337,91.313 29.337,92.583 31.496,94.742 31.496,97.79 30.226,99.06 R6.1@29.464,99.06
  Top Layer w0.8: R6.1@29.464,99.314 JP1.7
JTRST: JP1.3 R8.1 TVS2.1 U2.40 | length 78.3
  Top Layer w0.254: TVS2.1 19.812,91.313 20.828,90.297 20.828,87.757 21.844,86.741 59.436,86.741 61.595,84.582 61.595,76.962 57.511,72.878 U2.40
  Top Layer w0.5: TVS2.1 19.684,92.201 21.336,93.853 21.336,99.187 ; R8.1 21.209,99.06 21.336,99.187 ; JP1.3 24.384,102.235 21.336,99.187
K: P8.2 pad.K RLED2.2 | length 299.6
  Top Layer w0.8: v1(204.47,10.414) 204.47,47.498 216.672,59.7 P8.2 ; 217.424,59.944 RLED2.2 216.027,64.516 214.63,65.913 214.63,77.089 217.7,80.159 pad.K@217.7,92.7
  Bottom Layer w0.8: pad.K@12.3,22.7 12.3,14.751 16.637,10.414 v1(204.47,10.414)
L1: C21.2 L1.1 P1.1 | length 16.9
  Top Layer w0.5: P1.1 7.747,48.133 8.763,49.149 12.827,49.149 C21.2@12.827,49.276 ; C21.2 12.675,50.648 13.081,51.054 19.812,51.054 L1.1
L2: C16.2 L2.1 P1.2 | length 15.3
  Top Layer w0.5: P1.2 9.779,43.688 11.506,45.415 C16.2@12.827,45.415 ; C16.2 12.675,46.838 13.208,47.371 16.383,47.371 17.145,48.133 L2.1
L3: C15.2 L5.1 P1.3 | length 14.9
  Top Layer w0.5: P1.3 8.28,41.681 12.827,41.681 12.827,42.799 13.589,43.561 16.256,43.561 18.288,45.593 L5.1
L4: C14.2 L6.1 P1.4 | length 16
  Top Layer w0.5: P1.4 9.906,38.608 10.566,37.948 12.827,37.948 12.827,38.989 13.716,39.878 16.51,39.878 17.653,41.021 17.653,41.91 18.796,43.053 L6.1
MCU_LED: MCU_LED1.2 U2.2 | length 11
  Top Layer w0.254: MCU_LED1.2 46.228,69.342 47.534,68.036 U2.2
NetL1_2: L1.2 U2.10 | length 40.2
  Top Layer w0.254: L1.2 44.831,50.673 47.879,53.721 47.879,62.103 49.812,64.036 U2.10
NetL2_2: L2.2 U2.11 | length 40.9
  Top Layer w0.254: L2.2 24.892,48.133 26.797,50.038 45.085,50.038 48.641,53.594 48.641,61.849 50.328,63.536 U2.11
NetL5_2: L5.2 U2.12 | length 41.6
  Top Layer w0.254: L5.2 24.892,45.593 28.575,49.276 45.212,49.276 49.403,53.467 49.403,61.468 50.971,63.036 U2.12
NetL6_2: L6.2 U2.13 | length 41.8
  Top Layer w0.254: L6.2 25.4,43.053 30.861,48.514 45.466,48.514 50.038,53.086 50.038,57.023 53.511,60.496 U2.13
NetL7_2: L7.2 U2.14 | length 43.6
  Top Layer w0.254: L7.2 24.511,40.513 31.877,47.879 45.72,47.879 50.673,52.832 50.673,56.642 54.011,59.98 U2.14
NetL8_2: L8.2 U2.15 | length 45.4
  Top Layer w0.254: L8.2 23.368,37.973 32.512,47.117 45.974,47.117 51.435,52.578 51.435,56.261 54.511,59.337 U2.15
NetL9_1: L9.1 P2.4 TVS21.1 | length 11.8
  Top Layer w0.8: P2.4 10.287,61.087 10.795,61.595 TVS21.1 14.732,60.071 17.272,60.071 L9.1
NetL10_1: L10.1 P2.6 TVS20.1 | length 12.6
  Top Layer w0.8: P2.6 10.922,58.547 12.446,57.023 TVS20.1 13.208,56.515 14.478,55.245 16.891,55.245 L10.1
NetLED1_1: LED1.1 R19.2 | length 3.6
  Top Layer w0.5: R19.2 34.29,79.121 36.002,80.833 LED1.1
NetLS1_2: LS1.2 Q1.2 | length 149
  Top Layer w0.8: Q1.2 81.153,45.974 82.55,44.577 91.44,44.577 v2(92.71,43.307)
  Bottom Layer w0.8: v2(92.71,43.307) 101.092,34.925 216.916,34.925 221.491,39.5 LS1.2 LS1.2@222.377,40.259
NetMCU_LED1_1: MCU_LED1.1 R10.2 | length 3.2
  Top Layer w0.5: MCU_LED1.1@46.355,75.88 R10.2
NetP9_2: P9.2 R2.2 | length 27.8
  Top Layer w0.508: R2.2 v2(82.677,80.264)
  Bottom Layer w0.8: v2(82.677,80.264) 87.249,84.836 P9.2
NetP9_3: P9.3 R1.2 | length 28.2
  Top Layer w0.508: R1.2 v1(79.248,80.264)
  Bottom Layer w0.8: v1(79.248,80.264) 84.709,85.725 P9.3
NetQ1_1: Q1.1 R24.1 R28.2 | length 5.7
  Top Layer w0.6: Q1.1 R24.1 R28.2
NetR1_1: R1.1 TVS19.1 U3.18 | length 22.6
  Top Layer w0.508: R1.1 79.215,75.913 TVS19.1 76.962,73.533 78.549,71.945 84.264,71.945 86.741,69.469 86.741,67.056 85.852,66.167 U3.18
NetR2_1: R2.1 TVS22.2 U3.17 | length 19
  Top Layer w0.508: R2.1 TVS22.2@84.93,75.946 ; U3.17 86.741,64.897 88.392,66.548 88.392,70.866 84.963,74.295 TVS22.2
NetR13_1: R13.1 U2.31 | length 81.7
  Top Layer w0.254: U2.31 66.806,66.036 v2(67.183,65.659)
  Top Layer w0.5: R13.1 26.162,25.781 27.305,26.924 41.656,26.924 49.784,35.052 49.784,40.767 50.673,41.656 v2(52.959,41.656)
  Bottom Layer w0.5: v2(52.959,41.656) 56.769,41.656 67.183,52.07 v2(67.183,65.659)
NetR14_1: R14.1 U2.30 | length 86.7
  Top Layer w0.254: U2.30 64.639,65.536 v2(65.659,64.516)
  Top Layer w0.5: R14.1 17.018,26.289 19.177,28.448 40.259,28.448 48.387,36.576 48.387,42.037 50.419,44.069 v2(52.959,44.069)
  Bottom Layer w0.5: v2(52.959,44.069) 56.515,44.069 65.659,53.213 v2(65.659,64.516)
NetR28_1: R28.1 U3.11 | length 8.7
  Top Layer w0.5: U3.11 85.471,57.277 86.233,56.515 R28.1
NetR30_1: R30.1 U3.15 | length 19.3
  Top Layer w0.508: U3.15 89.154,62.357 95.148,68.351 R30.1
NetR32_1: R32.1 R34.1 U3.13 | length 20.7
  Top Layer w0.508: U3.13 94.615,59.817 95.91,58.522 R32.1 R34.1
NetR33_2: R33.2 U6.16 | length 43.9
  Top Layer w0.254: R33.2@91.001,75.242 R33.2 ; U6.16 v2(124.587,78.74)
  Top Layer w0.508: R33.2@91.001,75.242 92.456,73.787 105.283,73.787 v2(108.077,76.581)
  Bottom Layer w0.508: v2(108.077,76.581) 110.236,78.74 v2(124.587,78.74)
NetR35_1: R35.1 R36.1 U3.14 | length 21.8
  Top Layer w0.508: U3.14 90.805,61.087 94.793,65.075 R36.1 R35.1
NetR37_1: R37.1 U3.16 | length 20.2
  Top Layer w0.508: U3.16 88.011,63.627 96.012,71.628 R37.1
NetR39_2: R39.2 U7.16 | length 27
  Top Layer w0.254: v2(118.999,46.482) 120.142,47.625 U7.16
  Top Layer w1: v2(98.425,46.736) 98.551,46.862 R39.2
  Bottom Layer w0.508: v2@98.425,46.482 v2(118.999,46.482)
NetU1_2: U1.2 U2.22 | length 40.3
  Top Layer w0.254: U2.22 58.011,56.289 v2(59.69,54.61)
  Top Layer w0.5: U1.2 43.942,35.052 46.736,37.846 46.736,44.323 48.768,46.355 v2(52.959,46.355)
  Bottom Layer w0.5: v2(52.959,46.355) 55.245,46.355 59.69,50.8 v2(59.69,54.61)
NetU2_21: U2.21 U3.8 | length 32
  Top Layer w0.254: U2.21 57.511,54.503 59.69,52.324 64.897,52.324 66.167,53.594 66.167,57.658 67.691,59.182 69.469,59.182 70.104,59.817 U3.8
NetU2_32: U2.32 U3.3 | length 16.1
  Top Layer w0.254: U2.32 66.155,66.536 66.548,66.929 72.517,66.929 73.279,66.167 U3.3
NetU2_33: U2.33 U3.2 | length 15.8
  Top Layer w0.254: U2.33 65.766,67.036 66.167,67.437 U3.2
OSC_IN: C9.1 R11.1 U2.5 Y1.2 | length 17.8
  Top Layer w0.254: Y1.2@40.259,70.916 R11.1@44.5,66.675 ; R11.1 R11.1@44.5,66.675 ; U2.5 44.639,66.536 R11.1@44.5,66.675
  Top Layer w0.508: C9.1@36.321,70.916 Y1.2@40.259,70.916
OSC_OUT: C10.1 R11.2 U2.6 Y1.1 | length 20.7
  Top Layer w0.254: Y1.1@40.259,62.611 40.386,62.611 42.164,64.389 R11.2 45.847,64.389 47.494,66.036 U2.6
  Top Layer w0.508: C10.1 37.389,64.592 Y1.1@40.259,61.722 ; Y1.1@40.259,60.666 Y1.1 Y1.1@40.259,61.722 ; Y1.1@40.259,62.611 Y1.1@40.259,61.722
RESET: C11.2 JP1.15 P2.2 R12.1 TVS7.1 TVS8.1 U2.7 | length 113.4
  Top Layer w0.254: R12.1 41.656,57.277 42.418,58.039 42.418,61.468 43.244,62.293 45.53,62.293 48.772,65.536 U2.7
  Top Layer w0.5: TVS8.1 13.335,65.151 14.351,64.135 26.416,64.135 31.369,59.182 v2(36.068,59.182) ; R12.1@36.093,57.441 C11.2
  Top Layer w0.8: P2.2 10.668,65.786 TVS8.1 ; JP1.15 39.624,102.362 v2(44.45,97.536) 48.514,97.536 49.022,97.028 TVS7.1
  Bottom Layer w0.8: v2(36.068,59.182) 36.068,88.9 44.45,97.282 v2(44.45,97.536)
RXD_S: L10.2 U1.18 | length 30.8
  Top Layer w0.5: L10.2 v2(24.892,57.023) ; v2(30.099,36.322) U1.18
  Bottom Layer w0.5: v2(24.892,57.023) 26.924,54.991 26.924,39.497 v2(30.099,36.322)
SC5V: C25.1 C26.1 C27.1 L3.1 L4.1 Q2.3 R29.1 T1.2 | length 31
  Top Layer w0.5: L3.1 L4.1 T1.2@96.139,42.418 ; C25.1 C26.1 ; T1.2@96.571,41.58 C26.1 ; C27.1 C26.1
  Top Layer w0.8: Q2.3 83.312,39.294 85.014,39.294 87.706,36.601 C25.1
SCS1: U2.28 U3.4 | length 17
  Top Layer w0.254: U2.28 63.353,64.536 64.897,62.992 67.183,62.992 69.088,64.897 U3.4
SCS2: U2.27 U3.5 | length 16.9
  Top Layer w0.254: U2.27 62.71,64.036 64.516,62.23 67.818,62.23 69.215,63.627 U3.5
SDATA: U2.26 U3.6 | length 16.9
  Top Layer w0.254: U2.26 62.194,63.536 64.389,61.341 68.199,61.341 69.215,62.357 U3.6
SWR: U2.25 U3.7 | length 16.9
  Top Layer w0.254: U2.25 61.551,63.036 64.135,60.452 69.215,60.452 69.85,61.087 U3.7
TEST_RXD: CN1.2 R14.2 TVS17.1 | length 6.6
  Top Layer w0.8: R14.2 TVS17.1
  Top Layer w1: CN1.2 TVS17.1@20.32,17.272
TEST_TXD: CN1.3 R13.2 TVS16.1 | length 6.4
  Top Layer w1: CN1.3 TVS16.1@22.86,17.272 ; TVS16.1 R13.2@25.908,17.399
TXD_S: L9.2 U3.12 | length 73.3
  Top Layer w0.5: L9.2 v2(24.765,61.595) ; v2(57.277,52.324) 58.293,51.308 74.168,51.308 81.407,58.547 U3.12
  Bottom Layer w0.5: v2(24.765,61.595) 27.305,61.595 28.829,60.071 28.829,53.213 29.718,52.324 v2(57.277,52.324)
VDD1: C23.1 C24.1 L3.2 R33.1 U6.17 | length 88.7
  Top Layer w0.254: U6.17 125.222,74.93 127.381,77.089 v2(127.381,78.486)
  Top Layer w0.762: L3.2 92.837,51.181 93.599,51.943 v2(104.267,51.943) ; C24.1@97.168,78.231 106.679,78.231 v2(107.569,79.121)
  Top Layer w1: R33.1 97.168,78.231 C24.1
  Bottom Layer w0.508: v2(107.569,79.121) 108.712,80.264 126.492,80.264 127.381,79.375 v2(127.381,78.486)
  Bottom Layer w0.762: v2(104.267,51.943) 104.267,75.819 v2(107.569,79.121)
VDD2: C28.1 C29.1 L4.2 R39.1 U7.17 | length 25.3
  Top Layer w0.4: C29.1 119.088,48.984 119.507,49.403 U7.17
  Top Layer w0.762: L4.2 R39.1 105.931,49.148 C29.1
VOUT: Q2.1 R25.1 U2.17 | length 47
  Top Layer w0.254: U2.17 55.511,41.136 57.277,39.37 R25.1
  Top Layer w0.5: R25.1 77.47,39.37 79.121,41.021 Q2.1
WR1: R32.2 U6.11 | length 36.4
  Top Layer w0.254: U6.11 v2(121.412,74.93)
  Top Layer w0.508: R32.2@102.489,58.268 110.338,58.268 111.887,59.817 v2(111.887,72.517)
  Bottom Layer w0.508: v2(111.887,72.517) 114.3,74.93 v2(121.412,74.93)
WR2: R34.2 U7.11 | length 24.3
  Top Layer w0.254: v2(122.174,54.737) 123.317,53.594 U7.11
  Top Layer w0.508: R34.2 102.743,54.737 v2(113.919,54.737)
  Bottom Layer w0.508: v2(113.919,54.737) v2(122.174,54.737)
pads on no net: JP1.11 JP1.17 JP1.19 P2. P2.9 P2.10 P2.11 P2.12 U1.3 U1.4 U1.5 U1.6 U1.7 U1.8 U1.9 U1.11 U1.12 U1.13 U1.14 U1.15 U1.16 U1.17 U2.3 U2.4 U2.18 U2.19 U2.20 U2.29 U2.41 U2.42 U2.43 U2.45 U2.46 U6.10 U6.14 U6.15 U6.18 U6.19 U6.20 U6.25 U6.26 U6.27 U6.28 U6.29 U6.30 U6.31 U6.32 U6.33 U6.34 U6.35 U6.36 U6.37 U6.38 U6.39 U6.40 U7.10 U7.14 U7.15 U7.18 U7.19 U7.20 U7.25 U7.26 U7.27 U7.28 U7.29 U7.30 U7.31 U7.32 U7.33

## Polygon pours and split planes (outlines as drawn)
GND on Bottom Layer "GND" (hatched 45Degree grid 0.508 track 0.254, remove dead copper, pour order 4): 5.588,56.769 5.588,93.726 8.001,96.139 18.796,106.934 22.225,106.934 207.645,106.934 211.201,103.378 225.044,89.535 225.044,73.533 225.044,26.289 222.504,23.749 208.407,9.652 195.072,9.652 17.272,9.652 11.049,15.875 5.588,21.336 5.588,56.769
GND on Top Layer "GND" (hatched 45Degree grid 0.508 track 0.254, remove dead copper, pour order 3): 5.588,56.769 5.588,93.726 8.001,96.139 18.796,106.934 22.225,106.934 207.645,106.934 211.201,103.378 225.044,89.535 225.044,73.533 225.044,26.289 222.504,23.749 208.407,9.652 195.072,9.652 17.272,9.652 11.049,15.875 5.588,21.336 5.588,56.769

## Keep-outs
Keep-Out Layer:
  lines w0.254: -5.588,0 -5.588,115.4 230,115.4 230,0 -5.588,0

## Silkscreen, mask and mechanical layers (free items; w line width, h text height)
Top Overlay:
  text "LDD1" at 83.693,109.728 h1.52 r270
  text "LDD2" at 86.614,109.728 h1.52 r270
  text "5v" at 89.408,106.299 h1.52
  text "12V" at 226.187,79.375 h1
  text "SCREEN CONTROL V2.0" at 173.228,77.978 h2
  text "G" at 226.441,75.438 h1
  text "DATE:2017.7.14" at 173.101,70.866 h2
  text "HOKAI" at 173.355,62.611 h2
  text "K" at 227.584,59.69 h1
  text "A" at 227.711,54.991 h1
  text "G" at 17.272,10.922 h1
  text "R" at 20.066,10.922 h1
  text "T" at 22.86,10.795 h1
  text "V" at 25.4,10.795 h1
Bottom Overlay:
  lines w0.203: 19,18.7 211,18.7 ; 19,96.7 211,96.7 ; 12,18.7 218,18.7 218,96.7 12,96.7 12,18.7 ; 19,15.95 211,15.95 211,99.45 19,99.45 19,15.95